# Altium PCB 天地通门禁20813.PcbDoc (part 2 of 2)
Units mm, origin at the board's own origin, x right, y up, seen from the top; angles counter-clockwise.
Board outline 102.79 x 72.64 mm, 2 copper layers (Top Layer, Bottom Layer); 108 components, 65 nets, 314 pads, 370 vias.
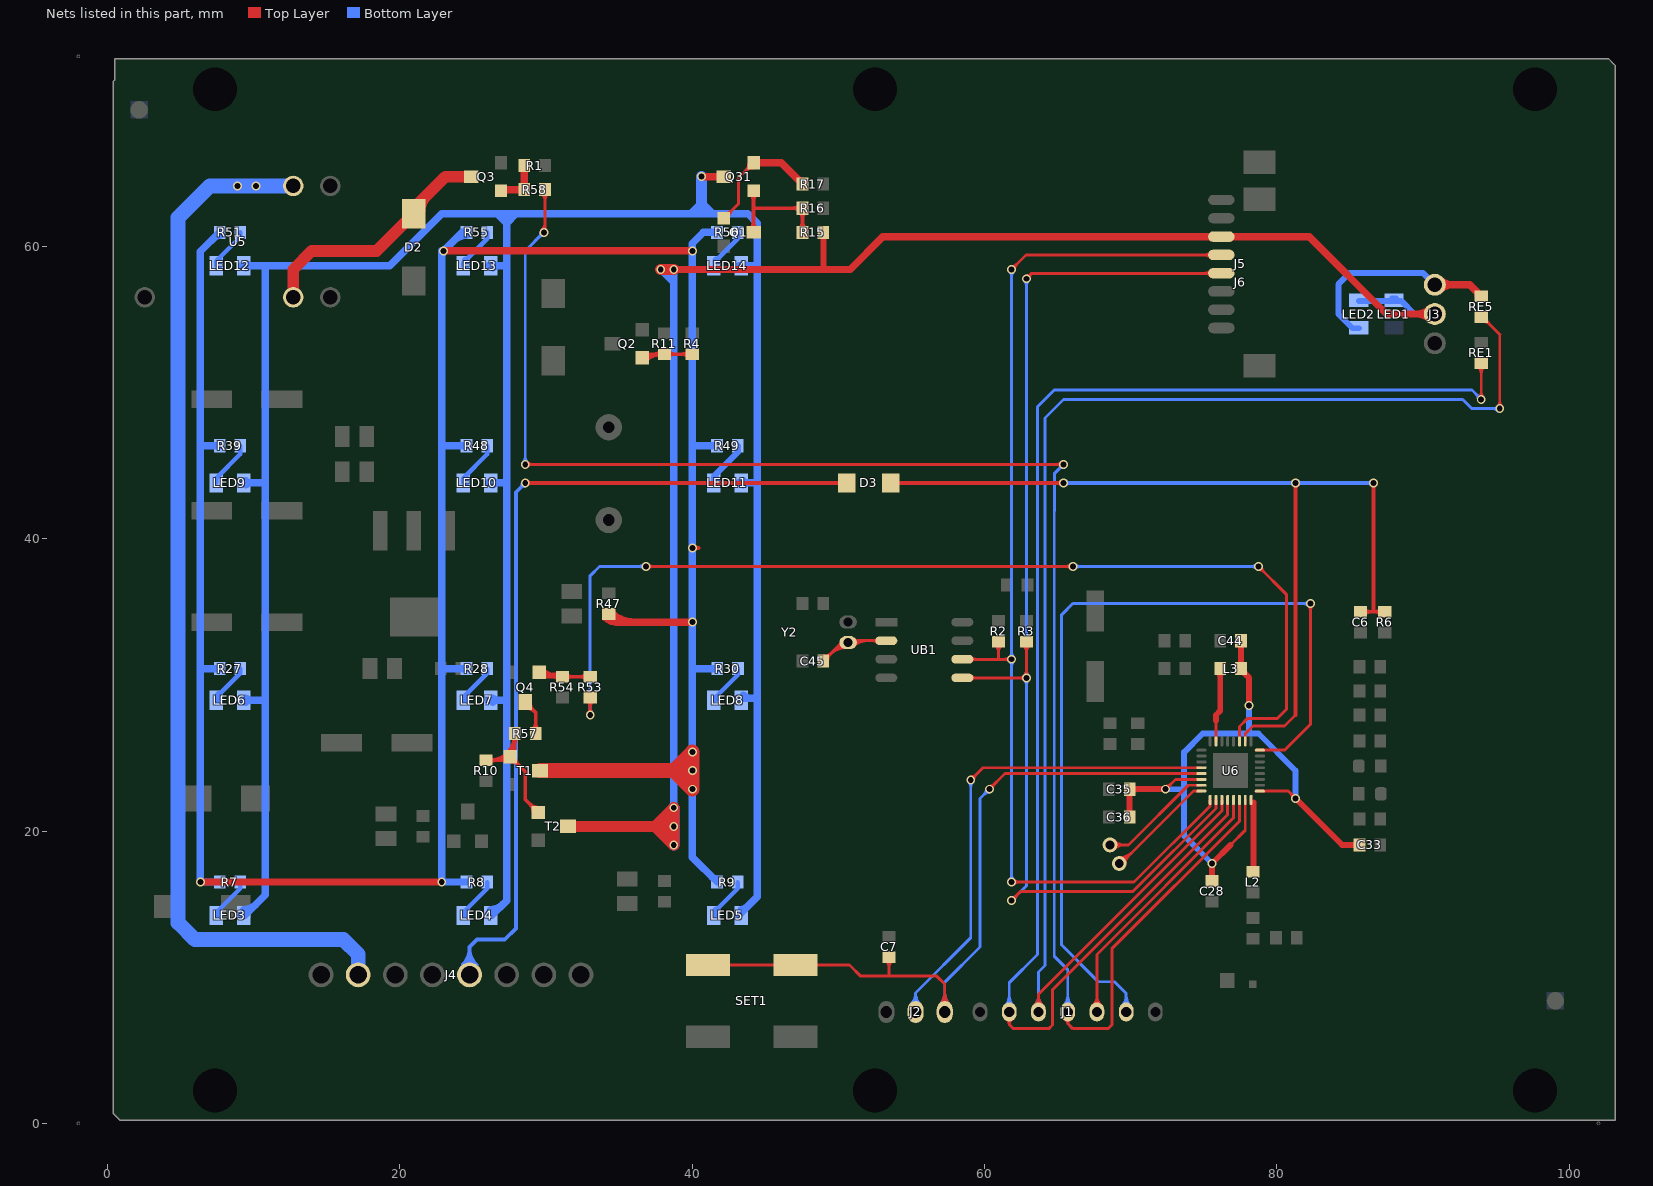
[diagram p2: the nets of this part, all layers, seen from the top]

## Via types
v1: diameter 0.61, hole 0.406, Top Layer to Bottom Layer, tented both sides, 370 vias

## Nets (pads, with @x,y where several pads share a name; then routed paths per layer and width w, separated by ;. In a path a pad name is that pad's centre, name@x,y a point inside that pad or via, vN(x,y) a via of type N, cw(c..) or ccw(c..) an arc to the next point about the centre after c; other vN are vias at no path point) (continued)
NetC45_2: C45.2 UB1.2 Y2.1 | length 10.7
  Top Layer w0.203: C45.2@48.971,31.623 50.368,33.02 UB1.2@53.28,33.02 ; C45.2@48.971,31.971 ccw(c48.971,32.813) 49.566,32.218 ; C45.2@49.27,31.673 cw(c49.869,31.673) 49.445,32.097 ; 49.453,32.105 cw(c50.515,31.042) Y2.1@50.515,32.545 ; 49.8,32.452 cw(c50.515,31.736) Y2.1@50.515,32.748 ; Y2.1@50.918,32.79 cw(c51.472,32.236) 51.472,33.02 ; Y2.1@51.061,32.647 cw(c51.963,31.745) 51.963,33.02 ; Y2.1@51.061,33.139 ccw(c51.35,33.428) 51.35,33.02 ; UB1.2@52.69,32.88 ccw(c52.351,32.541) 52.351,33.02 ccw(c52.351,33.499) UB1.2@52.69,33.16
NetD2_A: D2.A Q3.C U5.4 | length 18
  Top Layer w0.8: U5.4@12.7,56.515 12.7,58.42 13.97,59.69 18.415,59.69 D2.A@20.955,62.23 20.955,62.611 23.114,64.77 Q3.C@24.884,64.77 ; D2.A@21.355,62.43 cw(c22.758,62.43) 21.766,63.422
NetD3_1: D3.1 J4.4 | length 64.9
  Top Layer w0.254: v1(28.575,43.815) D3.1@50.57,43.815 ; v1@28.701,43.689 cw(c29.004,43.386) 29.004,43.815 cw(c29.004,44.244) v1@28.701,43.941 ; D3.1@50.504,43.622 ccw(c50.038,43.156) 50.038,43.815 ccw(c50.038,44.474) D3.1@50.504,44.008
  Bottom Layer w0.254: J4.4@24.289,10.836 ccw(c23.14,11.985) 24.765,11.985 ccw(c26.39,11.985) J4.4@25.241,10.836 ; J4.4@24.469,10.656 ccw(c23.753,11.372) 24.765,11.372 ccw(c25.777,11.372) J4.4@25.061,10.656 ; J4.4@24.765,10.16 24.765,12.065 25.273,12.573 27.178,12.573 27.94,13.335 27.94,43.18 v1(28.575,43.815) ; v1@28.397,43.815 cw(c27.968,43.815) 28.271,43.511 cw(c28.575,43.208) v1@28.575,43.637
NetL2_2: L2.2 U6.32 | length 5.5
  Top Layer w0.4: L2.2@78.268,17.363 ccw(c77.974,17.656) 78.389,17.656 ; L2.2@78.359,17.221 78.389,17.251 78.389,21.971 ; 78.389,17.752 ccw(c78.94,17.752) L2.2@78.55,17.363
NetL3_2: L3.2 U6.15 | length 5.9
  Top Layer w0.2: U6.15@75.835,26.13 75.835,27.559
  Top Layer w0.4: 75.835,27.559 75.835,27.94 76.124,28.229 L3.2@76.124,31.115 ; L3.2@75.982,30.924 cw(c75.641,30.582) 76.124,30.582 cw(c76.607,30.582) L3.2@76.265,30.924
NetLED3_1: LED3.1 R7.2 | length 3.2
  Bottom Layer w0.305: LED3.1@7.434,14.224 7.434,14.419 9.085,16.07 R7.2@9.085,16.51
  Bottom Layer w0.508: LED3.1@7.612,14.224 LED3.1@7.612,14.47
NetLED3_2: LED3.2 LED4.2 LED5.2 LED6.2 LED7.2 LED8.2 LED9.2 LED10.2 LED11.2 LED12.2 LED13.2 LED14.2 Q31.C | length 207.4
  Top Layer w0.508: v1(40.64,64.77) Q31.C@42.164,64.77
  Bottom Layer w0.508: LED3.2@9.136,14.224 9.398,14.224 10.795,15.621 10.795,28.956 ; LED6.2@9.136,28.956 10.795,28.956 ; LED9.2@9.136,43.815 10.795,43.815 ; LED12.2@9.136,58.674 10.795,58.674 ; LED3.2@9.314,14.63 ccw(c9.314,15.815) 10.151,14.977 ; LED6.2@9.457,28.812 cw(c9.804,28.465) 9.804,28.956 cw(c9.804,29.447) LED6.2@9.457,29.1 ; LED9.2@9.457,43.671 cw(c9.804,43.324) 9.804,43.815 cw(c9.804,44.306) LED9.2@9.457,43.959 ; LED12.2@9.457,58.53 cw(c9.804,58.183) 9.804,58.674 cw(c9.804,59.165) LED12.2@9.457,58.818 ; LED4.2@26.027,14.224 26.289,14.224 27.305,15.24 27.305,28.956 ; LED7.2@26.027,28.956 27.305,28.956 ; LED10.2@26.027,43.815 27.305,43.815 ; LED13.2@26.027,58.674 27.305,58.674 ; LED4.2@26.205,14.63 ccw(c26.205,15.815) 27.042,14.977 ; LED7.2@26.348,28.812 cw(c26.695,28.465) 26.695,28.956 cw(c26.695,29.447) LED7.2@26.348,29.1 ; LED10.2@26.348,43.671 cw(c26.695,43.324) 26.695,43.815 cw(c26.695,44.306) LED10.2@26.348,43.959 ; LED13.2@26.348,58.53 cw(c26.695,58.183) 26.695,58.674 cw(c26.695,59.165) LED13.2@26.348,58.818 ; 40.64,62.865 40.64,62.23 ; 41.91,62.23 41.402,62.23 ; LED5.2@43.172,14.224 44.45,15.502 44.45,29.083 ; LED8.2@43.172,29.083 44.45,29.083 ; LED11.2@43.172,43.815 44.45,43.815 ; LED14.2@43.172,58.674 44.45,58.674 ; LED5.2@43.35,14.63 ccw(c43.35,15.182) LED5.2@43.74,14.792 ; LED11.2@43.493,43.671 cw(c43.84,43.324) 43.84,43.815 cw(c43.84,44.306) LED11.2@43.493,43.959 ; LED14.2@43.493,58.53 cw(c43.84,58.183) 43.84,58.674 cw(c43.84,59.165) LED14.2@43.493,58.818 ; LED8.2@43.501,29.303 ccw(c44.032,29.834) 44.032,29.083 ; 10.795,28.956 10.795,43.815 ; 10.795,43.815 10.795,58.674 ; 10.795,58.674 19.304,58.674 22.86,62.23 26.67,62.23 ; 26.67,62.23 27.305,62.23 ; 26.67,62.23 27.305,61.595 ; 27.305,28.956 27.305,43.815 ; 27.305,43.815 27.305,58.674 ; 27.305,58.674 27.305,61.595 ; 27.305,61.595 27.305,62.23 ; 27.305,61.595 27.94,62.23 ; 27.305,62.23 27.94,62.23 ; 27.94,62.23 39.878,62.23 ; 39.878,62.23 40.64,62.23 ; 39.878,62.23 40.64,62.992 41.402,62.23 ; 40.64,62.23 41.402,62.23 ; 41.402,62.23 43.815,62.23 44.45,61.595 44.45,58.674 ; 44.45,29.083 44.45,43.815 ; 44.45,43.815 44.45,58.674
  Bottom Layer w0.762: 40.64,62.992 v1(40.64,64.77)
NetLED4_1: LED4.1 R8.2 | length 3.2
  Bottom Layer w0.305: LED4.1@24.325,14.224 24.325,14.419 25.976,16.07 R8.2@25.976,16.51
  Bottom Layer w0.508: LED4.1@24.503,14.224 LED4.1@24.503,14.47
NetLED5_1: LED5.1 R9.2 | length 3.3
  Bottom Layer w0.305: LED5.1@41.47,14.224 41.47,14.419 41.648,14.597 43.121,16.07 R9.2@43.121,16.51
  Bottom Layer w0.508: LED5.1@41.648,14.224 LED5.1@41.648,14.597
NetLED6_1: LED6.1 R27.2 | length 3.2
  Bottom Layer w0.305: LED6.1@7.434,28.956 7.434,29.151 7.612,29.329 9.085,30.802 R27.2@9.085,31.115
  Bottom Layer w0.508: LED6.1@7.612,28.956 LED6.1@7.612,29.329
NetLED7_1: LED7.1 R28.2 | length 3.1
  Bottom Layer w0.305: LED7.1@24.325,28.956 24.325,29.151 25.976,30.802 R28.2@25.976,31.115
  Bottom Layer w0.508: LED7.1@24.503,28.956 LED7.1@24.503,29.202
NetLED8_1: LED8.1 R30.2 | length 2.9
  Bottom Layer w0.305: LED8.1@41.478,28.956 41.478,29.032 43.129,30.683 R30.2@43.129,31.115
  Bottom Layer w0.508: LED8.1@41.648,29.083 LED8.1@41.656,29.083
NetLED9_1: LED9.1 R39.2 | length 3.2
  Bottom Layer w0.305: LED9.1@7.434,43.815 7.434,44.137 9.085,45.788 R39.2@9.085,46.355
NetLED10_1: LED10.1 R48.2 | length 3.6
  Bottom Layer w0.305: LED10.1@24.325,43.815 24.325,44.137 25.976,45.788 R48.2@25.976,46.355
  Bottom Layer w0.508: LED10.1@24.503,43.815 LED10.1@24.503,44.188
NetLED11_1: LED11.1 R49.2 | length 3.5
  Bottom Layer w0.406: LED11.1@41.47,43.815 41.47,44.264 43.121,45.915 R49.2@43.121,46.355
  Bottom Layer w0.508: LED11.1@41.648,43.815 LED11.1@41.648,44.061
NetLED12_1: LED12.1 R51.2 | length 3.3
  Bottom Layer w0.305: LED12.1@7.434,58.674 7.434,58.996 9.085,60.647 R51.2@9.085,60.96
  Bottom Layer w0.508: LED12.1@7.612,58.674 LED12.1@7.612,59.047
NetLED13_1: LED13.1 R55.2 | length 3.3
  Bottom Layer w0.305: LED13.1@24.325,58.674 24.325,58.869 24.503,59.047 25.976,60.52 R55.2@25.976,60.96
  Bottom Layer w0.508: LED13.1@24.503,58.674 LED13.1@24.503,59.047
NetLED14_1: LED14.1 R56.2 | length 2.9
  Bottom Layer w0.305: LED14.1@41.648,59.047 43.121,60.52 R56.2@43.121,60.96
  Bottom Layer w0.508: LED14.1@41.648,58.674 LED14.1@41.648,59.047
NetQ1_B: Q1.B Q31.E R17.2 | length 11.4
  Top Layer w0.203: Q1.B@42.164,61.91 43.18,62.926 43.18,64.704 Q31.E@44.196,65.72 ; Q1.B@42.164,62.233 ccw(c42.164,63.014) 42.716,62.462 ccw(c43.268,61.91) Q1.B@42.487,61.91 ; 43.589,65.113 cw(c44.196,64.506) Q31.E@44.196,65.364 ; 43.667,65.191 ccw(c43.17,65.688) Q31.E@43.873,65.688
  Top Layer w0.508: Q31.E@44.196,65.72 46.091,65.72 R17.2@47.549,64.262 ; R17.2@47.214,64.597 ccw(c47.549,64.931) R17.2@47.549,64.458
NetQ1_C: Q1.C Q31.B R15.1 R16.2 | length 13.2
  Top Layer w0.254: Q1.C@43.985,61.171 ccw(c43.477,61.679) 44.196,61.679 ccw(c44.915,61.679) Q1.C@44.407,61.171 ; Q31.B@43.985,63.609 cw(c43.477,63.101) 44.196,63.101 cw(c44.915,63.101) Q31.B@44.407,63.609 ; Q1.C@44.196,60.96 44.196,62.611 ; Q31.B@44.196,63.82 44.196,62.611 ; R15.1@47.356,61.203 ccw(c46.89,61.669) 47.549,61.669 ccw(c48.208,61.669) R15.1@47.742,61.203 ; R16.2@47.356,62.368 cw(c46.89,61.902) 47.549,61.902 cw(c48.208,61.902) R16.2@47.742,62.368 ; R16.2@47.356,62.418 ccw(c46.89,61.952) 46.89,62.611 ccw(c46.89,63.27) R16.2@47.356,62.804 ; R15.1@47.549,60.96 R16.2@47.549,62.611 44.196,62.611
NetQ2_1: Q2.1 R4.1 R11.1 | length 8.7
  Top Layer w0.254: Q2.1@36.576,52.39 36.815,52.629 R11.1@38.1,52.629 R4.1@40.005,52.629 ; Q2.1@36.63,52.336 cw(c37.337,51.629) 37.337,52.629 ; Q2.1@36.809,52.157 cw(c37.95,51.016) R11.1@37.95,52.629 ; R11.1@37.857,52.436 ccw(c37.391,51.97) 37.391,52.629 ccw(c37.391,53.288) R11.1@37.857,52.822 ; R11.1@38.343,52.436 cw(c38.809,51.97) 38.809,52.629 cw(c38.809,53.288) R11.1@38.343,52.822 ; R4.1@39.762,52.436 ccw(c39.296,51.97) 39.296,52.629 ccw(c39.296,53.288) R4.1@39.762,52.822
NetQ3_B: Q3.B R1.2 R58.2 | length 3.7
  Top Layer w0.508: Q3.B@26.916,63.82 26.977,63.881 R58.2@28.499,63.881 R1.2@28.499,65.532 ; Q3.B@27.037,63.699 cw(c27.476,63.26) 27.476,63.881
NetQ4_1: Q4.1 R53.2 R54.2 | length 10.2
  Top Layer w0.254: Q4.1@29.525,30.861 29.83,30.556 R54.2@31.115,30.556 R53.2@33.02,30.556 ; Q4.1@29.579,30.915 ccw(c30.445,31.781) 30.445,30.556 ; Q4.1@29.758,31.094 ccw(c31.058,32.394) R54.2@31.058,30.556 ; 30.424,30.726 ccw(c30.596,31.369) R54.2@30.929,30.793 ; 30.432,30.724 cw(c30.263,30.093) R54.2@30.829,30.42 ; R54.2@30.872,30.363 ccw(c30.406,29.897) 30.406,30.556 ccw(c30.406,31.215) R54.2@30.872,30.749 ; R54.2@31.358,30.363 cw(c31.824,29.897) 31.824,30.556 cw(c31.824,31.215) R54.2@31.358,30.749 ; R53.2@32.777,30.363 ccw(c32.311,29.897) 32.311,30.556 ccw(c32.311,31.215) R53.2@32.777,30.749
NetQ4_3: Q4.3 R57.2 | length 4.7
  Top Layer w0.254: Q4.3@28.575,28.829 29.286,28.118 ; Q4.3@28.579,28.406 cw(c28.59,27.422) 29.286,28.118 ; Q4.3@28.905,28.736 ccw(c29.478,28.736) 29.073,28.331 ; R57.2@29.093,26.913 ccw(c28.627,27.379) 29.286,27.379 ccw(c29.945,27.379) R57.2@29.479,26.913 ; R57.2@29.286,26.67 29.286,28.118
NetR10_2: R10.2 R57.1 T1.G T2.G | length 17.1
  Top Layer w0.254: R10.2@25.9,24.841 27.32,24.841 T1.G@27.559,25.08 ; R10.2@26.143,24.648 cw(c26.609,24.182) 26.609,24.841 cw(c26.609,25.5) R10.2@26.143,25.034 ; R10.2@26.185,24.841 ccw(c26.185,26.454) 27.326,25.313 ccw(c26.026,26.613) R57.1@27.864,26.613 ; 26.798,24.841 ccw(c26.798,25.841) 27.505,25.134 ccw(c26.639,26) 27.864,26 ; T1.G@27.559,24.75 cw(c27.559,23.953) 28.123,24.516 cw(c28.686,25.08) T1.G@27.889,25.08 ; R57.1@27.671,26.427 cw(c27.205,25.961) 27.864,25.961 cw(c28.523,25.961) R57.1@28.057,26.427 ; R57.1@27.864,26.67 27.864,25.385 T1.G@27.559,25.08 ; T2.G@29.134,21.27 ccw(c28.337,21.27) 28.9,21.834 ccw(c29.464,22.397) T2.G@29.464,21.6 ; T2.G@29.464,21.27 28.575,22.159 28.575,24.064 T1.G@27.559,25.08
NO: J4.7 U5.3 | length 71.6
  Bottom Layer w1.016: U5.3@12.7,64.135 6.985,64.135 4.826,61.976 4.826,13.716 5.969,12.573 16.129,12.573 17.145,11.557 J4.7@17.145,10.16
  other v1: 8.89,64.135 10.16,64.135
P04/LED_RED: J1.3 RE5.2 U6.27 | length 105
  Top Layer w0.2: J1.3@63.407,8.053 ccw(c62.724,8.736) 63.69,8.736 ccw(c64.656,8.736) J1.3@63.973,8.053 ; J1.3@63.69,7.62 63.69,8.826 76.235,21.371 U6.27@76.235,22.13 ; v1@95.105,49.04 ccw(c94.756,49.389) 95.25,49.389 ccw(c95.744,49.389) v1@95.395,49.04 ; v1(95.25,48.895) 95.25,53.975
  Top Layer w0.203: RE5.2@93.98,55.169 94.056,55.169 95.25,53.975 ; RE5.2@94.03,54.87 cw(c94.03,54.087) 94.584,54.641 ; RE5.2@94.328,55.169 ccw(c94.986,55.169) 94.521,54.704
  Bottom Layer w0.2: 64.135,44.831 64.135,48.26 65.405,49.53 92.71,49.53 93.345,48.895 v1(95.25,48.895) ; v1@95.105,48.75 ccw(c94.756,48.401) 94.756,48.895 ccw(c94.756,49.389) v1@95.105,49.04
  Bottom Layer w0.203: J1.3@63.408,8.052 ccw(c62.728,8.732) 63.69,8.732 ccw(c64.652,8.732) J1.3@63.972,8.052 ; J1.3@63.69,7.62 63.69,10.35 64.135,10.795 64.135,44.831
P05/LED_GREEN: J1.2 RE1.2 U6.28 | length 105.2
  Top Layer w0.2: J1.2@61.484,7.127 cw(c61.265,6.763) 61.69,6.763 ; J1.2@61.69,7.62 61.69,6.763 ; J1.2@61.896,7.127 ccw(c62.115,6.763) 61.69,6.763 ; U6.28@76.635,22.13 76.635,21.136 64.643,9.144 64.643,6.731 64.389,6.477 61.976,6.477 61.69,6.763 ; RE1.2@93.768,51.782 cw(c93.256,51.27) 93.98,51.27 cw(c94.704,51.27) RE1.2@94.192,51.782 ; v1@93.835,49.675 ccw(c93.486,50.024) 93.98,50.024 ccw(c94.474,50.024) v1@94.125,49.675 ; v1(93.98,49.53) RE1.2@93.98,51.994
  Bottom Layer w0.2: J1.2@61.407,8.053 ccw(c60.724,8.736) 61.69,8.736 ccw(c62.656,8.736) J1.2@61.973,8.053 ; J1.2@61.69,7.62 61.69,9.62 63.627,11.557 63.627,49.022 64.77,50.165 93.345,50.165 v1(93.98,49.53) ; v1@93.775,49.53 ccw(c93.281,49.53) 93.63,49.88 ccw(c93.98,50.229) v1@93.98,49.735
P06/MOTO1: J1.5 U6.29 | length 19.9
  Top Layer w0.2: J1.5@67.407,8.053 ccw(c66.724,8.736) 67.69,8.736 ccw(c68.656,8.736) J1.5@67.973,8.053 ; J1.5@67.69,7.62 67.69,11.556 77.035,20.901 U6.29@77.035,22.13
P07/MOTO0: J1.4 R58.1 U6.30 | length 125.4
  Top Layer w0.2: v1@29.7,61.105 ccw(c29.167,61.638) 29.921,61.638 ; R58.1@29.709,63.619 cw(c29.197,63.107) 29.921,63.107 cw(c30.645,63.107) R58.1@30.133,63.619 ; v1(29.845,60.96) 29.921,61.036 R58.1@29.921,63.881 ; 29.921,61.27 ccw(c30.155,61.27) v1@29.99,61.105 ; J1.4@65.513,7.111 cw(c65.373,6.827) 65.69,6.827 ; J1.4@65.69,7.62 65.69,6.827 ; J1.4@65.867,7.111 ccw(c66.007,6.827) 65.69,6.827 ; U6.30@77.435,22.13 77.435,20.666 68.707,11.938 68.707,6.731 68.453,6.477 66.04,6.477 65.69,6.827
  Top Layer w0.203: v1(28.575,45.085) v1(65.405,45.085) ; v1@28.719,44.941 cw(c29.066,44.594) 29.066,45.085 cw(c29.066,45.576) v1@28.719,45.229 ; v1@65.261,44.941 ccw(c64.914,44.594) 64.914,45.085 ccw(c64.914,45.576) v1@65.261,45.229
  Bottom Layer w0.2: 64.77,41.91 64.77,11.43 65.69,10.51 J1.4@65.69,7.62 ; J1.4@65.407,8.053 ccw(c64.724,8.736) 65.69,8.736 ccw(c66.656,8.736) J1.4@65.973,8.053
  Bottom Layer w0.203: v1@28.431,45.229 ccw(c28.084,45.576) 28.575,45.576 ccw(c29.066,45.576) v1@28.719,45.229 ; v1(28.575,45.085) 28.575,59.69 v1(29.845,60.96) ; v1@29.642,60.96 cw(c29.151,60.96) 29.498,60.613 cw(c29.845,60.266) v1@29.845,60.757 ; 64.77,41.91 64.77,44.45 v1(65.405,45.085) ; v1@65.202,45.085 cw(c64.711,45.085) 65.058,44.738 cw(c65.405,44.391) v1@65.405,44.882
PWR_CTL: R53.1 U6.11 | length 79.3
  Top Layer w0.2: U6.11@77.435,26.13 77.435,27.143 77.978,27.686 80.01,27.686 80.645,28.321 80.645,36.195 v1(78.74,38.1) ; v1@78.74,37.895 cw(c78.74,37.401) 79.09,37.75 cw(c79.439,38.1) v1@78.945,38.1
  Top Layer w0.203: R53.1@32.809,28.923 cw(c32.3,28.413) 33.02,28.413 cw(c33.74,28.413) R53.1@33.231,28.923 ; v1@32.876,28.084 ccw(c32.529,28.431) 33.02,28.431 ccw(c33.511,28.431) v1@33.164,28.084 ; v1(33.02,27.94) R53.1@33.02,29.134 ; v1(36.83,38.1) v1(66.04,38.1) ; v1@36.974,37.956 cw(c37.321,37.609) 37.321,38.1 cw(c37.321,38.591) v1@36.974,38.244 ; v1@65.896,37.956 ccw(c65.549,37.609) 65.549,38.1 ccw(c65.549,38.591) v1@65.896,38.244
  Bottom Layer w0.203: v1@32.876,28.084 ccw(c32.529,28.431) 33.02,28.431 ccw(c33.511,28.431) v1@33.164,28.084 ; v1(33.02,27.94) 33.02,37.465 33.655,38.1 v1(36.83,38.1) ; v1@36.686,37.956 ccw(c36.339,37.609) 36.339,38.1 ccw(c36.339,38.591) v1@36.686,38.244 ; v1(66.04,38.1) v1(78.74,38.1) ; v1@66.184,37.956 cw(c66.531,37.609) 66.531,38.1 cw(c66.531,38.591) v1@66.184,38.244 ; v1@78.596,37.956 ccw(c78.249,37.609) 78.249,38.1 ccw(c78.249,38.591) v1@78.596,38.244
RD1: pad.2@68.58,19.05 U6.23 | length 9.5
  Top Layer w0.2: pad.2@68.58,19.05 69.85,19.05 73.93,23.13 U6.23@74.835,23.13 ; pad.2@68.868,18.762 cw(c69.565,18.065) 69.565,19.05 cw(c69.565,20.035) pad.2@68.868,19.338
RED: J3.1 LED2.2 RE5.1 | length 16.9
  Top Layer w0.508: J3.1@90.805,57.372 93.199,57.372 RE5.1@93.98,56.591 ; J3.1@91.156,57.021 cw(c92.002,56.175) 92.002,57.372 cw(c92.002,58.569) J3.1@91.156,57.723 ; RE5.1@93.645,56.926 cw(c93.311,56.591) RE5.1@93.784,56.591
  Bottom Layer w0.406: LED2.2@85.619,54.397 85.176,54.397 84.201,55.372 84.201,57.404 84.963,58.166 90.011,58.166 J3.1@90.805,57.372
REMOTO: C6.2 D3.2 R6.1 U6.10 | length 71.7
  Top Layer w0.2: U6.10@77.835,26.13 77.835,26.654 78.359,27.178 80.518,27.178 81.28,27.94
  Top Layer w0.254: D3.2@53.57,43.815 v1(65.405,43.815) ; D3.2@53.636,43.622 cw(c54.102,43.156) 54.102,43.815 cw(c54.102,44.474) D3.2@53.636,44.008 ; v1@65.279,43.689 ccw(c64.976,43.386) 64.976,43.815 ccw(c64.976,44.244) v1@65.279,43.941 ; v1@81.154,43.689 cw(c80.851,43.386) 81.28,43.386 cw(c81.709,43.386) v1@81.406,43.689 ; 81.28,27.94 v1(81.28,43.815) ; C6.2@85.725,35.001 86.614,35.001 ; C6.2@85.968,34.808 cw(c86.434,34.342) 86.434,35.001 cw(c86.434,35.66) C6.2@85.968,35.194 ; v1@86.488,43.689 cw(c86.185,43.386) 86.614,43.386 cw(c87.043,43.386) v1@86.74,43.689 ; v1(86.614,43.815) 86.614,35.001 ; R6.1@87.133,34.808 ccw(c86.667,34.342) 86.667,35.001 ccw(c86.667,35.66) R6.1@87.133,35.194 ; R6.1@87.376,35.001 86.614,35.001
  Bottom Layer w0.254: v1(65.405,43.815) v1(81.28,43.815) v1(86.614,43.815) ; v1@65.531,43.689 cw(c65.834,43.386) 65.834,43.815 cw(c65.834,44.244) v1@65.531,43.941 ; v1@81.154,43.689 ccw(c80.851,43.386) 80.851,43.815 ccw(c80.851,44.244) v1@81.154,43.941 ; v1@81.406,43.689 cw(c81.709,43.386) 81.709,43.815 cw(c81.709,44.244) v1@81.406,43.941 ; v1@86.488,43.689 ccw(c86.185,43.386) 86.185,43.815 ccw(c86.185,44.244) v1@86.488,43.941
RSTN: J1.6 U6.8 | length 62.8
  Top Layer w0.2: U6.8@78.581,25.53 80.521,25.53 82.296,27.305 v1(82.296,35.56) ; v1@82.151,35.415 cw(c81.802,35.066) 82.296,35.066 cw(c82.79,35.066) v1@82.441,35.415
  Bottom Layer w0.2: J1.6@69.407,8.053 ccw(c68.724,8.736) 69.69,8.736 ccw(c70.656,8.736) J1.6@69.973,8.053 ; J1.6@69.69,7.62 69.69,8.89 68.895,9.685 67.785,9.685 65.278,12.192 65.278,34.798 66.04,35.56 v1(82.296,35.56) ; v1@82.151,35.415 ccw(c81.802,35.066) 81.802,35.56 ccw(c81.802,36.054) v1@82.151,35.705
RX2/SETKEY: C7.1 J2.1 SET1.2 SET1.2/2 U6.21 | length 63.3
  Top Layer w0.2: v1(60.325,22.86) 61.393,23.928 63.031,23.928 63.033,23.93 U6.21@74.581,23.93 ; v1@60.325,23.065 ccw(c60.325,23.559) 60.675,23.21 ccw(c61.024,22.86) v1@60.53,22.86
  Top Layer w0.203: SET1.2/2@41.069,10.832 SET1.2@47.069,10.832 50.763,10.832 51.525,10.07 53.467,10.07 ; SET1.2@47.392,10.509 cw(c48.173,9.728) 48.173,10.832 cw(c48.173,11.936) SET1.2@47.392,11.155 ; SET1.2@47.536,10.365 cw(c48.663,9.238) 48.663,10.832 cw(c48.663,12.426) SET1.2@47.536,11.299 ; C7.1@53.256,11.143 cw(c52.747,10.633) 53.467,10.633 cw(c54.187,10.633) C7.1@53.678,11.143 ; C7.1@53.467,11.354 53.467,10.07 ; J2.1@56.96,8.137 ccw(c56.194,8.903) 57.277,8.903 ccw(c58.36,8.903) J2.1@57.594,8.137 ; J2.1@57.104,7.993 ccw(c56.685,8.412) 57.277,8.412 ccw(c57.869,8.412) J2.1@57.45,7.993 ; J2.1@57.277,7.62 57.277,9.525 56.732,10.07 53.467,10.07
  Bottom Layer w0.2: J2.1@56.959,8.138 ccw(c56.191,8.906) 57.277,8.906 ccw(c58.363,8.906) J2.1@57.595,8.138 ; J2.1@57.1,7.997 ccw(c56.673,8.424) 57.277,8.424 ccw(c57.881,8.424) J2.1@57.454,7.997 ; J2.1@57.277,7.62 57.277,9.652 59.69,12.065 59.69,22.225 v1(60.325,22.86) ; v1@60.12,22.86 cw(c59.626,22.86) 59.975,22.51 cw(c60.325,22.161) v1@60.325,22.655
SCL: J5.5 J6.5 R2.2 U6.25 UB1.6 | length 86.9
  Top Layer w0.2: 64.389,16.51 70.231,16.51 75.435,21.714 U6.25@75.435,22.13 ; 75.318,21.597 ccw(c75.034,21.88) U6.25@75.435,21.88
  Top Layer w0.203: UB1.6@58.48,31.75 60.96,31.75 ; UB1.6@59.07,31.61 cw(c59.409,31.271) 59.409,31.75 cw(c59.409,32.229) UB1.6@59.07,31.89 ; R2.2@60.749,32.733 cw(c60.24,32.223) 60.96,32.223 cw(c61.68,32.223) R2.2@61.171,32.733 ; R2.2@60.96,32.944 60.96,31.75 ; v1@61.705,31.606 ccw(c61.358,31.259) 61.358,31.75 ccw(c61.358,32.241) v1@61.705,31.894 ; v1(61.849,16.51) 64.389,16.51 ; v1(61.849,31.75) 60.96,31.75 ; v1(61.849,58.42) 62.835,59.406 J6.5@76.2,59.406 ; v1@61.849,58.623 ccw(c61.849,59.114) 62.196,58.767 ccw(c62.543,58.42) v1@62.052,58.42 ; v1@61.993,16.366 cw(c62.34,16.019) 62.34,16.51 cw(c62.34,17.001) v1@61.993,16.654 ; 75.002,59.406 ccw(c75.002,60.074) J5.5@75.474,59.602 ; 75.099,59.406 cw(c75.099,58.875) J5.5@75.474,59.25 ; J5.5@75.474,59.23 ccw(c75.05,58.806) 75.05,59.406 ccw(c75.05,60.006) J5.5@75.474,59.582
  Bottom Layer w0.2: 61.849,53.086 61.849,54.483
  Bottom Layer w0.203: v1@61.705,16.654 ccw(c61.358,17.001) 61.849,17.001 ccw(c62.34,17.001) v1@61.993,16.654 ; v1@61.705,31.606 cw(c61.358,31.259) 61.849,31.259 cw(c62.34,31.259) v1@61.993,31.606 ; v1@61.705,31.894 ccw(c61.358,32.241) 61.849,32.241 ccw(c62.34,32.241) v1@61.993,31.894 ; v1@61.705,58.276 cw(c61.358,57.929) 61.849,57.929 cw(c62.34,57.929) v1@61.993,58.276 ; v1(61.849,16.51) v1(61.849,31.75) 61.849,53.086 ; 61.849,54.483 v1(61.849,58.42)
SDA: J5.4 J6.4 R3.2 U6.26 UB1.5 | length 90.4
  Top Layer w0.2: 66.929,15.875 70.162,15.875 75.835,21.548 U6.26@75.835,22.13
  Top Layer w0.203: UB1.5@58.48,30.48 v1(62.865,30.48) R3.2@62.865,32.944 ; UB1.5@59.07,30.34 cw(c59.409,30.001) 59.409,30.48 cw(c59.409,30.959) UB1.5@59.07,30.62 ; v1(61.849,15.24) 62.484,15.875 66.929,15.875 ; v1@61.849,15.443 ccw(c61.849,15.934) 62.196,15.587 ccw(c62.543,15.24) v1@62.052,15.24 ; R3.2@62.654,32.733 cw(c62.145,32.223) 62.865,32.223 cw(c63.585,32.223) R3.2@63.076,32.733 ; v1@62.721,30.336 ccw(c62.374,29.989) 62.374,30.48 ccw(c62.374,30.971) 62.721,30.624 ccw(c62.374,30.971) 62.865,30.971 ccw(c63.356,30.971) v1@63.009,30.624 ; v1(62.865,57.785) 63.236,58.156 J6.4@76.2,58.156 ; v1@62.865,57.988 ccw(c62.865,58.479) 63.212,58.132 ccw(c63.559,57.785) v1@63.068,57.785 ; 75.002,58.156 ccw(c75.002,58.824) J5.4@75.474,58.352 ; 75.099,58.156 cw(c75.099,57.625) J5.4@75.474,58 ; J5.4@75.474,57.98 ccw(c75.05,57.556) 75.05,58.156 ccw(c75.05,58.756) J5.4@75.474,58.332
  Bottom Layer w0.203: v1(61.849,15.24) 62.865,16.256 v1(62.865,30.48) v1(62.865,57.785) ; v1@61.849,15.443 ccw(c61.849,15.934) 62.196,15.587 ccw(c62.543,15.24) v1@62.052,15.24 ; v1@62.721,30.336 cw(c62.374,29.989) 62.865,29.989 cw(c63.356,29.989) v1@63.009,30.336 ; v1@62.721,30.624 ccw(c62.374,30.971) 62.865,30.971 ccw(c63.356,30.971) v1@63.009,30.624 ; v1@62.721,57.641 cw(c62.374,57.294) 62.865,57.294 cw(c63.356,57.294) v1@63.009,57.641
TD1: pad.1@69.215,17.78 U6.24 | length 9.9
  Top Layer w0.2: pad.1@69.215,17.78 69.342,17.78 74.292,22.73 U6.24@74.835,22.73 ; pad.1@69.215,17.988 ccw(c69.215,18.797) 69.787,18.225 ; pad.1@69.215,18.188 ccw(c69.215,19.48) 70.128,18.566 ; pad.1@69.623,17.78 cw(c70.301,17.78) 69.822,18.26
TX2: J2.2 U6.20 | length 37.7
  Top Layer w0.2: v1(59.055,23.495) 59.89,24.33 U6.20@74.835,24.33
  Top Layer w0.203: v1@59.055,23.698 ccw(c59.055,24.189) 59.402,23.842 ccw(c59.749,23.495) v1@59.258,23.495
  Bottom Layer w0.203: J2.2@54.96,8.137 ccw(c54.194,8.903) 55.277,8.903 ccw(c56.36,8.903) J2.2@55.594,8.137 ; J2.2@55.104,7.993 ccw(c54.685,8.412) 55.277,8.412 ccw(c55.869,8.412) J2.2@55.45,7.993 ; J2.2@55.277,7.62 55.277,8.922 59.055,12.7 v1(59.055,23.495) ; v1@58.911,23.351 cw(c58.564,23.004) 59.055,23.004 cw(c59.546,23.004) v1@59.199,23.351
VDD: C28.2 C33.2 C35.2 C36.2 C44.2 L3.1 U6.1 U6.22 U6.31 | length 56.8
  Top Layer w0.2: v1(72.39,22.86) 73.06,23.53 U6.22@74.581,23.53 ; v1@72.39,23.065 ccw(c72.39,23.559) 72.74,23.21 ccw(c73.089,22.86) v1@72.595,22.86 ; 76.835,19.05 77.835,20.05 U6.31@77.835,22.13 ; U6.1@78.581,22.73 80.775,22.73 v1(81.28,22.225) ; v1@81.075,22.225 ccw(c80.581,22.225) 80.93,22.575 ccw(c81.28,22.924) v1@81.28,22.43
  Top Layer w0.406: C36.2@69.787,21.144 ccw(c69.451,21.48) 69.926,21.48 ccw(c70.401,21.48) C36.2@70.065,21.144 ; C35.2@69.787,22.671 cw(c69.451,22.335) 69.926,22.335 cw(c70.401,22.335) C35.2@70.065,22.671 ; C36.2@69.926,20.955 C35.2@69.926,22.86 v1(72.39,22.86) ; C35.2@70.065,22.721 cw(c70.401,22.385) 70.401,22.86 cw(c70.401,23.335) C35.2@70.065,22.999 ; C28.2@75.426,16.725 ccw(c75.09,17.061) 75.565,17.061 ccw(c76.04,17.061) C28.2@75.704,16.725 ; C28.2@75.565,16.586 v1(75.565,17.78) 76.835,19.05 ; L3.1@77.407,31.304 ccw(c77.071,31.64) 77.546,31.64 ccw(c78.021,31.64) L3.1@77.685,31.304 ; C44.2@77.407,32.831 cw(c77.071,32.495) 77.546,32.495 cw(c78.021,32.495) C44.2@77.685,32.831 ; L3.1@77.546,30.868 cw(c77.546,30.456) L3.1@77.837,30.748 ; C44.2@77.546,33.02 L3.1@77.546,31.115 77.546,31.039 78.105,30.48 v1(78.105,28.575) ; L3.1@77.743,31.065 ccw(c78.281,31.065) L3.1@77.901,30.684 ; v1(81.28,22.225) 84.455,19.05 C33.2@85.649,19.05 ; C33.2@85.51,18.911 ccw(c85.174,18.575) 85.174,19.05 ccw(c85.174,19.525) C33.2@85.51,19.189
  Bottom Layer w0.4: v1(72.39,22.86) 73.66,22.86 ; 78.74,26.67 81.28,24.13 v1(81.28,22.225)
  Bottom Layer w0.406: v1(75.565,17.78) 73.66,19.685 73.66,22.86 73.66,25.4 74.93,26.67 78.105,26.67 ; v1(78.105,28.575) 78.105,26.67 ; 78.74,26.67 78.105,26.67
VDD3V3: J3.2 J5.6 J6.6 LED1.1 LED2.1 R15.2 T2.D | length 123.6
  Top Layer w0.406: R15.2@48.832,60.771 cw(c48.496,60.435) 48.971,60.435 cw(c49.446,60.435) R15.2@49.11,60.771 ; 48.971,58.471 R15.2@48.971,60.96
  Top Layer w0.508: v1(38.735,58.42) 50.8,58.42 53.036,60.656 J6.6@76.2,60.656 82.219,60.656 87.503,55.372 J3.2@90.805,55.372 ; J3.2@90.454,55.021 ccw(c89.608,54.175) 89.608,55.372 ccw(c89.608,56.569) J3.2@90.454,55.723
  Top Layer w0.762: T2.D@31.496,20.32 37.465,20.32 ; v1(37.846,58.42) v1(38.735,58.42) ; 37.465,20.32 v1(38.735,19.05) v1(38.735,20.32) ; 37.465,20.32 v1(38.735,20.32) ; 37.465,20.32 v1(38.735,21.59) v1(38.735,20.32)
  Bottom Layer w0.406: LED2.1@85.619,56.277 88.503,56.277 89.408,55.372 J3.2@90.805,55.372 ; LED1.1@87.859,56.439 LED1.1@88.138,56.439 ; J3.2@90.379,55.029 ccw(c89.662,54.451) 89.662,55.372 ccw(c89.662,56.293) J3.2@90.379,55.715
  Bottom Layer w0.508: v1(38.735,21.59) 38.735,57.531 ; 38.735,57.531 v1(37.846,58.42) v1(38.735,58.42) 38.735,57.531
  Bottom Layer w0.762: v1(38.735,19.05) v1(38.735,20.32) v1(38.735,21.59)
VDD5V: R7.1 R8.1 R9.1 R27.1 R28.1 R30.1 R39.1 R47.2 R48.1 R49.1 R51.1 R55.1 R56.1 T1.D | length 211
  Top Layer w0.254: v1@40.131,39.244 cw(c40.434,38.941) 40.434,39.37 cw(c40.434,39.799) v1@40.131,39.496
  Top Layer w0.508: v1(6.35,16.51) v1(22.86,16.51) ; v1(22.987,59.69) v1(40.005,59.69) ; R47.2@34.084,34.593 ccw(c34.815,35.324) 34.815,34.29 ; R47.2@34.29,34.849 34.849,34.29 v1(40.005,34.29) ; R47.2@34.443,34.952 ccw(c36.042,36.55) 36.042,34.29 ; R47.2@34.486,34.849 ccw(c34.959,34.849) R47.2@34.625,34.514
  Top Layer w1.016: T1.D@29.591,24.13 38.735,24.13 ; 38.735,24.13 v1(40.005,22.86) v1(40.005,24.13) ; 38.735,24.13 v1(40.005,24.13) ; 38.735,24.13 v1(40.005,25.4) v1(40.005,24.13)
  Bottom Layer w0.508: R51.1@7.328,60.625 cw(c7.663,60.291) R51.1@7.663,60.764 ; R7.1@7.663,16.51 v1(6.35,16.51) 6.35,31.115 ; R27.1@7.663,31.115 6.35,31.115 ; R39.1@7.663,46.355 6.35,46.355 ; R51.1@7.663,60.96 6.35,59.647 6.35,46.355 ; 22.86,59.261 cw(c23.416,59.261) v1@23.023,59.654 ; 23.713,60.416 cw(c24.554,59.574) R55.1@24.554,60.764 ; R8.1@24.554,16.51 v1(22.86,16.51) 22.86,31.115 ; R28.1@24.554,31.115 22.86,31.115 ; R48.1@24.554,46.355 22.86,46.355 ; R55.1@24.554,60.96 24.257,60.96 v1(22.987,59.69) 22.86,59.69 22.86,46.355 ; v1(40.005,22.86) 40.005,18.204 R9.1@41.699,16.51 ; v1(40.005,25.4) 40.005,31.115 ; R9.1@41.364,16.845 ccw(c41.699,17.179) R9.1@41.699,16.706 ; R30.1@41.699,31.115 40.005,31.115 ; R49.1@41.699,46.355 40.005,46.355 ; R56.1@41.699,60.96 40.767,60.96 40.005,60.198 v1(40.005,59.69) 40.005,46.355 ; 6.35,31.115 6.35,46.355 ; 22.86,31.115 22.86,46.355 ; 40.005,31.115 v1(40.005,34.29) v1(40.005,39.37) 40.005,46.355
  Bottom Layer w0.762: v1(40.005,22.86) v1(40.005,24.13) v1(40.005,25.4)
pads on no net: J5.7 J5.8 J5.9 J5.10 J6.7 J6.8 SET1.1/2 U6.5 U6.9 U6.12 U6.13 UB1. UB1.3 UB1.7 Y2.3

## Polygon pours and split planes (outlines as drawn)
GND on Bottom Layer "Bottom Layer-GND" (hatched 45Degree grid 0.279 track 0.381, remove dead copper, pour order 3): -2.794,73.406 -2.794,-1.016 103.251,-1.016 103.251,73.787 -2.794,73.787
GND on Top Layer "Top Layer-GND" (solid, remove dead copper, pour order 4): -2.794,73.406 -2.794,-1.016 103.251,-1.016 103.251,73.787 -2.794,73.787

## Keep-outs
Keep-Out Layer:
  circle w0.254: c7.35,2.25 r1.55
  circle w0.254: c7.35,70.75 r1.5
  circle w0.254: c97.65,70.75 r1.5
  circle w0.254: c97.65,2.25 r1.5
  circle w0.254: c52.5,70.75 r1.5
  circle w0.254: c52.5,2.25 r1.5
  pour cut-out: -2.413,67.945 18.415,67.945 18.415,52.705 -2.413,52.705
  pour cut-out: 13.335,12.065 28.448,12.065 28.829,11.684 28.829,7.874 28.448,7.493 13.335,7.493 12.954,7.874 12.954,11.684
  pour cut-out: 92.71,59.817 93.345,59.182 93.345,51.562 92.71,50.927 88.9,50.927 88.265,51.562 88.265,59.182 88.9,59.817
  pour cut-out: 51.943,35.179 51.562,35.56 49.784,35.56 49.403,35.179 49.403,32.131 49.784,31.75 51.562,31.75 51.943,32.131
  lines w0.254: -2,4 ccw(c2,4) 2,0 98,0 ccw(c98,4) 102,4 102,69 ccw(c98,69) 98,73 2,73 ccw(c2,69) -2,69 -2,4

## Other copper
Top Layer:
  region net NetD3_1: 50.673,43.815 49.911,44.577 49.149,43.815 49.911,43.053
  region net NetD3_1: 51.181,43.053 51.181,44.577 49.911,44.577 49.911,43.053
  region net REMOTO: 54.991,43.815 54.229,44.577 53.467,43.815 54.229,43.053
  region net REMOTO: 54.229,43.053 54.229,44.577 52.959,44.577 52.959,43.053
  region: 80.345,61.772 80.345,67.818 77.343,67.818 77.343,61.772
  region: 80.255,50.586 80.255,53.213 77.075,53.213 77.075,50.586
  region net GND: 16.747,42.672 16.747,48.133 14.814,48.133 14.814,42.672
  region net GND: 9.525,32.409 9.525,51.572 4.826,51.572 4.826,32.409
  region net GND: 77.47,11.43 74.897,11.43 74.897,9.525 77.47,9.525
  region net GND: 77.47,9.525 76.541,10.454 75.665,9.578 76.594,8.649
  region net GND: 76.864,25.025 76.235,25.654 75.696,25.115 76.325,24.487
  region net GND: 25.298,38.735 25.298,42.739 22.149,42.739 22.149,38.735
  region net GND: 82.55,11.43 82.55,13.843 80.899,13.843 80.899,11.43
  region net VDD: 76.073,16.129 76.073,17.018 75.057,17.018 75.057,16.129
  region net VDD: 76.073,17.018 75.565,17.526 75.057,17.018 75.565,16.51
  region net NetL2_2: 78.867,16.764 78.867,17.656 77.851,17.656 77.851,16.764
  region net NetL2_2: 78.867,17.656 78.359,18.164 77.851,17.656 78.359,17.148
  region net GND: 78.867,12.192 78.867,13.081 77.851,13.081 77.851,12.192
  region net GND: 78.867,12.192 78.359,12.7 77.851,12.192 78.359,11.684
  region net VDD: 78.105,30.607 78.105,33.528 77.089,33.528 77.089,30.607
  region net NetL3_2: 76.581,30.607 76.581,31.623 75.692,31.623 75.692,30.607
  region net NetL3_2: 76.581,30.607 76.137,31.052 75.692,30.607 76.136,30.163
  region net VDD: 70.358,20.447 70.358,23.368 69.469,23.368 69.469,20.447
  region net VDD: 70.866,22.86 70.358,23.368 69.85,22.86 70.358,22.352
  region net GND: 79.312,12.636 78.867,13.081 78.423,12.636 78.867,12.192
  region net COM: 13.97,53.594 13.97,54.229 13.589,54.61 10.414,54.61 7.62,57.404 4.318,57.404 3.429,58.293 3.429,61.214 3.048,61.595 1.778,61.595 1.397,61.214 1.397,56.007 1.905,55.499 6.985,55.499 9.144,53.34 13.716,53.34
  region net NC: 15.748,63.119 16.129,63.5 16.129,65.659 15.24,66.548 11.049,66.548 10.795,66.294 10.795,65.786 11.049,65.532 13.843,65.532 14.351,65.024 14.351,63.5 14.732,63.119
  region net NO: 11.811,65.151 13.208,65.151 13.589,64.77 13.589,63.5 13.208,63.119 11.811,63.119 11.303,63.627 8.636,63.627 8.382,63.881 8.382,64.389 8.636,64.643 11.303,64.643
  region net 5V: 20.32,48.895 17.399,51.816 17.399,54.61 16.51,55.499 14.732,55.499 14.351,55.88 14.351,57.15 14.732,57.531 18.796,57.531 20.066,58.801 21.971,58.801 21.971,56.642 19.05,53.721 19.05,52.451 21.59,49.911 21.59,38.481 23.495,36.576 23.495,24.638 24.257,23.876 27.94,23.876 28.194,23.622 28.194,22.606 27.94,22.352 26.035,22.352 25.654,21.971 25.654,20.701 25.4,20.447 18.288,20.447 17.78,20.955 17.78,22.86 19.05,24.13 19.05,37.211 20.32,38.481
  region net 20V: 9.017,20.574 9.271,20.32 12.065,20.32 13.589,21.844 13.589,47.244 14.859,48.514 16.891,48.514 17.145,48.26 17.145,39.37 17.78,38.735 19.05,38.735 19.431,39.116 19.431,48.768 17.78,50.419 10.414,50.419 10.16,50.165 10.16,24.638 9.017,23.495
  pour cut-out: 102.235,-0.635 102.235,9.779 80.899,9.779 80.518,10.16 80.518,13.208 79.375,14.351 79.375,22.225 79.121,22.479 77.724,22.479 77.343,22.098 77.343,10.033 76.835,9.525 75.565,9.525 74.295,8.255 74.295,-0.635
  region net NetL2_2: 78.588,22.098 78.308,22.377 78.156,22.377 78.156,21.895 78.334,21.717 78.588,21.717
Bottom Layer:
  region net VDD3V3: 88.9,55.753 88.9,56.896 84.836,56.896 84.836,55.753
  region net COM: 3.429,61.214 3.048,61.595 1.778,61.595 1.397,61.214 1.397,56.007 1.905,55.499 3.048,55.499 3.429,55.88
  region net NO: 13.589,64.77 13.208,65.151 11.811,65.151 10.922,64.262 10.922,64.008 11.811,63.119 13.208,63.119 13.589,63.5
  region net NC: 14.732,63.119 15.748,63.119 16.129,63.5 16.129,65.659 15.24,66.548 14.351,66.548 13.589,65.786 14.351,65.024 14.351,63.5
  pour cut-out: 102.235,-0.635 102.235,9.525 75.565,9.525 74.295,8.255 74.295,-0.635

## Silkscreen, mask and mechanical layers (free items; w line width, h text height)
Top Overlay:
  circle w0.254: c7.35,2.25 r3.6
  circle w0.254: c7.35,70.75 r3.6
  circle w0.254: c97.65,70.75 r3.6
  circle w0.254: c97.65,2.25 r3.6
  circle w0.254: c52.5,2.4 r3.6
  circle w0.254: c52.5,70.6 r3.6
  lines w0.127: 46.855,1 46.855,72 ; 46.855,12 102,12
  lines w0.254: 82.296,49.276 101.854,49.276
  text "NO" at 12.7,66.675 h0.76
  text "NC" at 15.24,66.675 h0.76
  text "D3V3" at 70.485,60.325 h0.76
  text "SCL" at 70.485,59.055 h0.76
  text "SDA" at 70.485,57.785 h0.76
  text "R" at 87.503,56.896 h0.76
  text "IRQ" at 70.485,56.515 h0.76
  text "GND" at 70.485,55.245 h0.76
  text "M3V3" at 70.485,53.975 h0.76
  text "COM" at 2.54,52.705 h0.76
  text "G" at 87.503,52.705 h0.76
  text "JYD-MJ" at 55.88,46.355 h0.76
  text "V1.0" at 69.85,46.355 h0.76
  text "20-9-9" at 57.15,41.275 h0.76
  text "RD" at 70.485,18.542 h0.76
  text "TD" at 70.485,17.272 h0.76
  text "GND" at 52.07,9.144 h0.76
  text "TX2" at 55.626,9.144 h0.76 r90
  text "RX2" at 57.658,9.144 h0.76 r90
  text "+24V" at 13.97,5.715 h0.76 r270
  text "NO" at 16.51,5.715 h0.76 r270
  text "COM" at 19.05,5.715 h0.76 r270
  text "NC" at 21.59,5.715 h0.76 r270
  text "REMO" at 24.13,5.715 h0.76 r270
  text "M3V3" at 26.67,5.715 h0.76 r270
  text "GND" at 29.21,5.715 h0.76 r270
  text "GND" at 31.75,5.715 h0.76 r270
  text "M3V3" at 59.309,5.715 h0.76 r270
  text "P05" at 61.341,5.715 h0.76 r270
  text "P04" at 63.373,5.715 h0.76 r270
  text "P07" at 65.278,5.715 h0.76 r270
  text "P06" at 67.31,5.715 h0.76 r270
  text "RSN" at 69.342,5.715 h0.76 r270
  text "GND" at 71.374,5.715 h0.76 r270
Bottom Overlay:
  circle w0.127: c25.3,14.2 r4
  circle w0.127: c8.4,14.2 r4
  circle w0.127: c8.4,29 r4
  circle w0.127: c25.3,29 r4
  circle w0.127: c42.2,14.2 r4
  circle w0.127: c42.2,29 r4
  circle w0.127: c42.2,43.8 r4
  circle w0.127: c42.2,58.6 r4
  circle w0.127: c25.3,58.6 r4
  circle w0.127: c25.3,43.8 r4
  circle w0.127: c8.4,43.8 r4
  circle w0.127: c8.4,58.6 r4
  region: 93.771,58.166 93.777,58.166 93.777,52.124 cw(c91.237,52.124) 91.237,49.584 89.662,49.584 89.662,61.133 91.231,61.133 cw(c91.231,58.593) 93.771,58.593
  region: 93.771,52.451 93.771,52.124 cw(c91.231,52.124) 91.231,49.584 81.808,49.584 cw(c81.808,52.124) 79.268,52.124 79.268,52.431
  region: 91.231,61.133 cw(c91.231,58.593) 93.771,58.593 93.771,58.039 79.268,58.039 79.248,58.593 cw(c81.788,58.593) 81.788,61.133
  region: 79.268,52.124 ccw(c81.808,52.124) 81.808,49.584 83.82,49.584 83.82,61.133 81.808,61.133 ccw(c81.808,58.593) 79.268,58.593
  lines w0.102: 1.3,10 1.3,63 49.3,63 49.3,10 1.3,10
  lines w0.127: -0.95,5.95 -0.95,67.05 100.965,67.05 100.965,5.95 -0.95,5.95 ; 79.268,52.431 ccw(c82.115,52.431) 82.115,49.584 90.924,49.584 ccw(c90.924,52.431) 93.771,52.431 93.771,58.286 ccw(c90.924,58.286) 90.924,61.133 82.115,61.133 ccw(c82.115,58.286) 79.268,58.286 79.268,52.431
Mechanical 2:
  circle w0.254: c7.3,2.3 r1.5
  circle w0.254: c7.3,70.7 r1.5
  circle w0.254: c97.5,70.7 r1.5
  circle w0.254: c97.5,2.3 r1.5
Mechanical 3:
  circle w0.254: c83.4,30.2 r1.3
  lines w0.254: -1.5,36.5 102.5,36.5 ; 0.5,14.2 49.5,14.2 ; 0.5,29 49.5,29 ; 0.5,43.8 49.5,43.8 ; 0.5,58.6 49.5,58.6 ; 8.4,6 8.4,66 ; 25.3,6 25.3,66 ; 42.41,6 42.41,66 ; 78.74,55.372 94.615,55.372 ; 86.487,48.895 86.487,61.595

## Dimensions
-2,0 to -2,73 on Mechanical 1
-2,0 to 102,0 on Mechanical 1